# EAGLE board CAN_board (EAGLE 7.1.0)
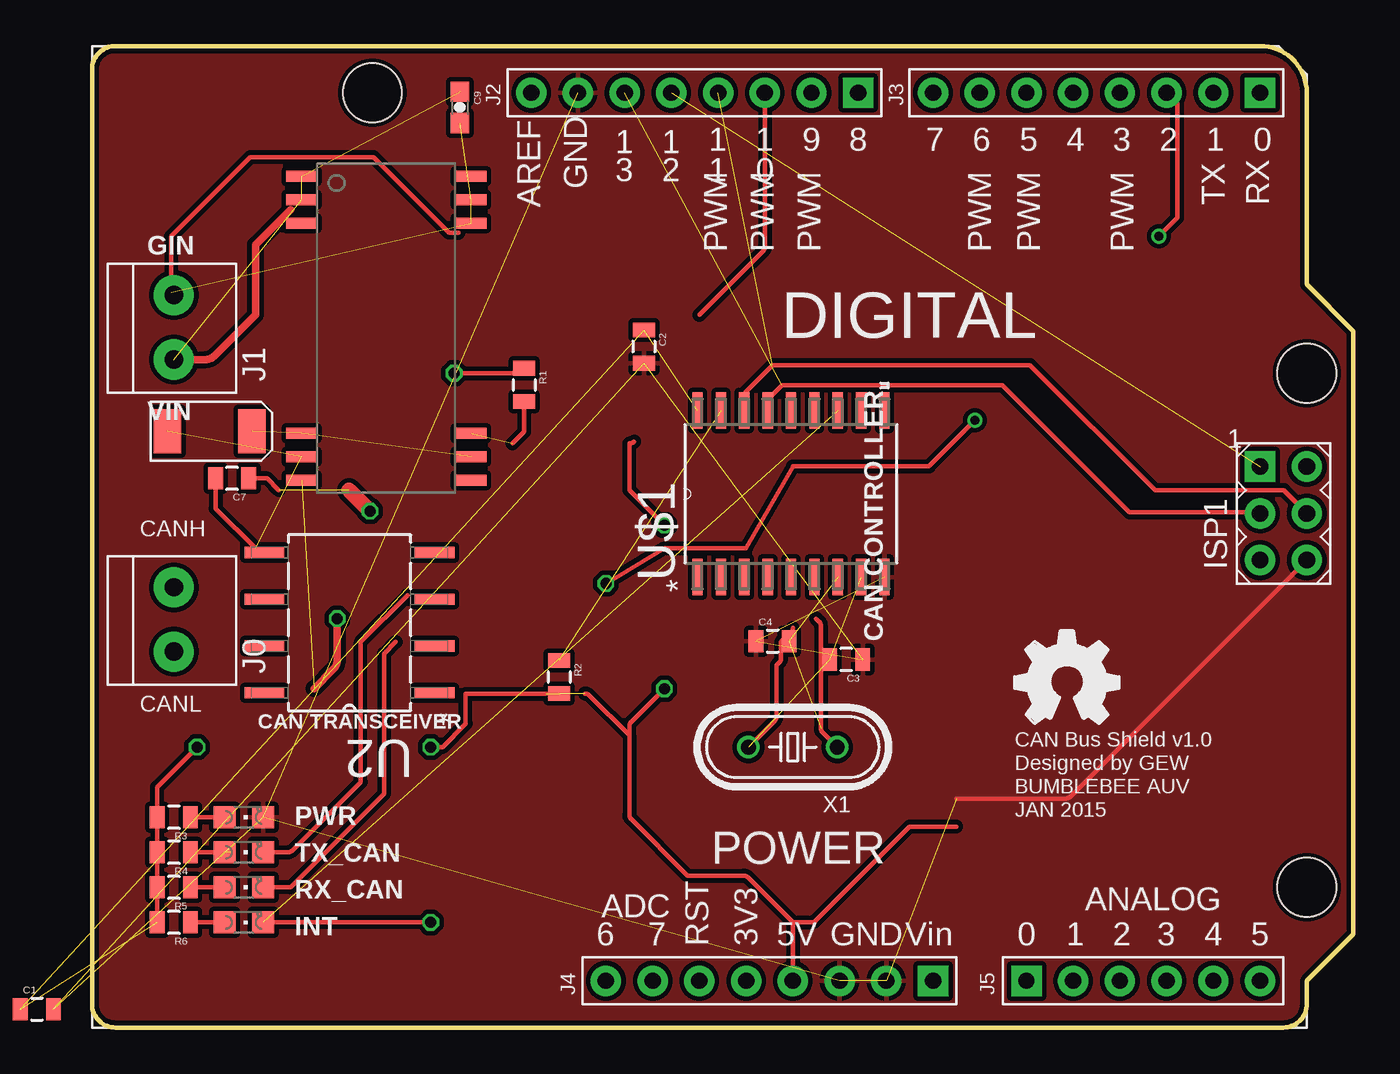
[diagram p0: board, top side]
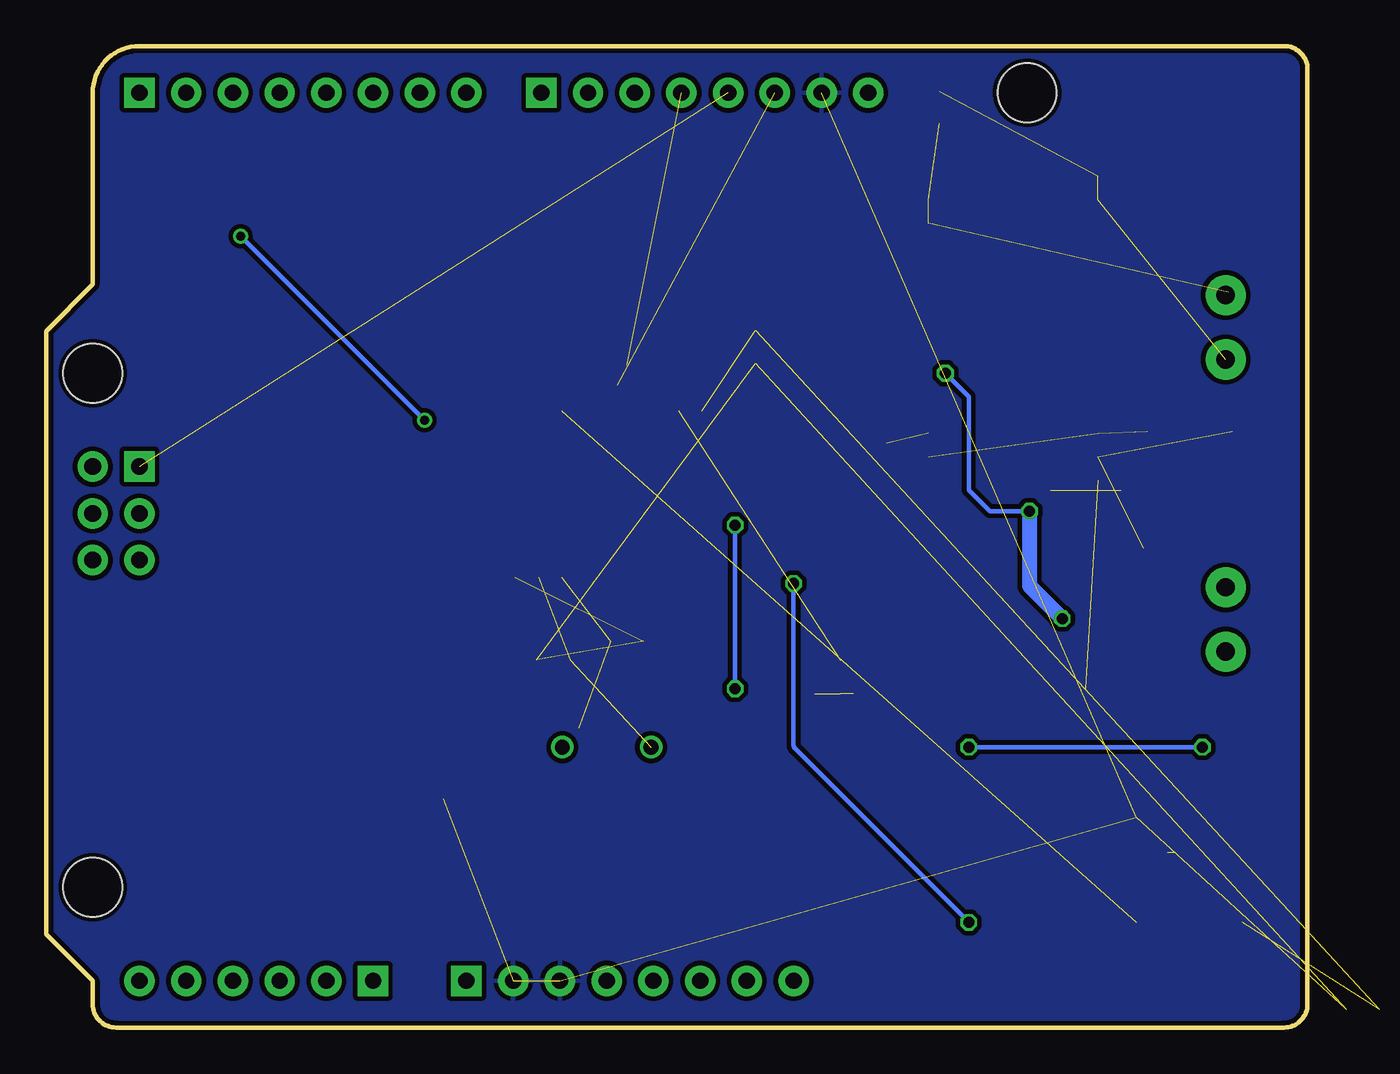
[diagram p1: board, bottom side, seen from below]

Size 68.58 x 53.34 mm. Coordinates in mm from the lower left corner, seen from the top.
Outline: 66.04,2.54 66.04,1.27 arc-90 64.77,0 1.27,0 arc-90 0,1.27 0,52.07 arc-90 1.27,53.34 63.5,53.34 arc-90 66.04,50.8 66.04,40.39 68.58,37.85 68.58,5.08 66.04,2.54
Copper layers (1*2*15*16): Top 0.035mm / dielectric 0.2mm / Route2 0.0175mm / dielectric 1.1mm / Route15 0.0175mm / dielectric 0.2mm / Bottom 0.035mm
Design rules "SeeedStudio_DRU_no_angle_20130527": minimum track width 6mil, minimum drill 12mil, track to track 6mil, track to pad 6mil, pad to pad 6mil, via to via 6mil, smd to smd 0mil, copper to edge 10mil, drill to drill 10mil, minimum pad ring 6mil, minimum via ring 6mil, stop-mask expansion 2mil, vias tented up to drill 25mil, thermal gap 10mil
Net classes: 0 default: width 0.203 mm, drill 0.305 mm, clearance 0.203 mm

## Footprints (pad centres in the part's own frame; a part is rotated, then mirrored left to right if it is on the bottom)
0805 = smd 0.8 x 1.2: 1 -0.9,0; 2 0.9,0
EIA6032 = smd 1.5 x 2.4: P$1 -2.3,0; P$2 2.3,0
0603-CAP = smd 1.1 x 1: 1 -0.85,0; 2 0.85,0
AVRISP = drill 0.9 pad 1.626: 1 -1.27,2.54; 2 1.27,2.54; 3 -1.27,0; 4 1.27,0; 5 -1.27,-2.54; 6 1.27,-2.54
1X2-3.5MM = drill 1 pad 2.184: 1 1.8,0; 2 -1.7,0
CHIPLED_0805 = smd 1.2 x 1.2: A 0,-1.05; C 0,1.05
SOIC254P1040X485-8N = smd 2.159 x 0.61: 1 -4.623,3.81; 2 -4.623,1.27; 3 -4.623,-1.27; 4 -4.623,-3.81; 5 4.623,-3.81; 6 4.623,-1.27; 7 4.623,1.27; 8 4.623,3.81
ARDUINO = drill 0.889 pad 1.651 square: 1 63.5,50.8; 9 41.656,50.8; 17 50.8,2.54; 23 45.72,2.54; 36 63.5,30.48 | drill 0.889 pad 1.651: 2 60.96,50.8; 3 58.42,50.8; 4 55.88,50.8; 5 53.34,50.8; 6 50.8,50.8; 7 48.26,50.8; 8 45.72,50.8; 10 39.116,50.8; 11 36.576,50.8; 12 34.036,50.8; 13 31.496,50.8; 14 28.956,50.8; 15 26.416,50.8; 16 23.876,50.8; 18 53.34,2.54; 19 55.88,2.54; 20 58.42,2.54; 21 60.96,2.54; 22 63.5,2.54; 24 43.18,2.54; 25 40.64,2.54; 26 38.1,2.54; 27 35.56,2.54; 28 33.02,2.54; 29 30.48,2.54; 30 27.94,2.54; 31 66.04,30.48; 32 66.04,27.94; 33 66.04,25.4; 34 63.5,25.4; 35 63.5,27.94 | hole 3.2: 15.24,50.8; 66.04,35.56; 66.04,7.62
SOIC127P1030X265-18N = smd 1.981 x 0.559: 1 -4.521,5.08; 2 -4.521,3.81; 3 -4.521,2.54; 4 -4.521,1.27; 5 -4.521,0; 6 -4.521,-1.27; 7 -4.521,-2.54; 8 -4.521,-3.81; 9 -4.521,-5.08; 10 4.521,-5.08; 11 4.521,-3.81; 12 4.521,-2.54; 13 4.521,-1.27; 14 4.521,0; 15 4.521,1.27; 16 4.521,2.54; 17 4.521,3.81; 18 4.521,5.08
DCR01-SOIC28 = smd 0.6 x 1.7: 1 -8.255,-4.6; 2 -6.985,-4.6; 3 -5.715,-4.6; 12 5.715,-4.6; 13 6.985,-4.6; 14 8.255,-4.6; 15 8.255,4.6; 16 6.985,4.6; 17 5.715,4.6; 26 -5.715,4.6; 27 -6.985,4.6; 28 -8.255,4.6; P$2 -6.985,4.6
HC49US = drill 0.813: 1 -2.413,0; 2 2.413,0

## Placement (x,y rotation side)
C1  100nF  [0805]  -3,1 0 top
C2  100nF  [0805]  30,37 270 top
C3  22pF  [0805]  41,20 180 top
C4  22pF  [0805]  37,21 0 top
C5  [EIA6032]  6.4,32.4 180 top
C7  100nF  [0805]  7.62,29.84 180 top
C9  2.2uF  [0603-CAP]  20,50 270 top
ISP1  AVRISP-6  [AVRISP]  64.77,27.94 0 top
J0  1X2-3.5MM  [1X2-3.5MM]  4.45,22.23 270 top
J1  1X2-3.5MM  [1X2-3.5MM]  4.45,38.1 270 top
LED1  YELLOW  [CHIPLED_0805]  8.26,11.43 270 top
LED2  BLUE  [CHIPLED_0805]  8.26,9.53 270 top
LED3  BLUE  [CHIPLED_0805]  8.26,7.62 270 top
LED4  RED  [CHIPLED_0805]  8.26,5.71 270 top
R1  10K  [0805]  23.5,34.92 270 top
R2  10K  [0805]  25.4,19.05 270 top
R3  330  [0805]  4.45,11.43 180 top
R4  330  [0805]  4.45,9.53 180 top
R5  330  [0805]  4.45,7.62 180 top
R6  330  [0805]  4.45,5.71 180 top
U2  ISO1050DUBR  [SOIC254P1040X485-8N]  14,22 180 top
U3  [ARDUINO]  0,0 0 top
U$1  MCP2515-E/SO  [SOIC127P1030X265-18N]  38,29 90 top
U$2  [OSHW_FILLX200_NOTEXT]  50.16,16.51 0 top
U$5  DCR01SO  [DCR01-SOIC28]  16,38 270 top
X1  16MHZ  [HC49US]  38.1,15.24 180 top

## Library data of the parts
C1 C2 C7 = SparkFun-Capacitors; OC_NEWARK: unknown; PROD_ID: CAP-08064
C3 C4 = SparkFun-Capacitors; MPN: MC0603N220K500CT; OC_NEWARK: 06R5152; PROD_ID: CAP-08064
C5 = SparkFun-Capacitors
C9 = SparkFun-Passives
ISP1 J0 J1 LED1-LED4 = adafruit; OC_NEWARK: unknown
R1 R2 = SparkFun-Passives; OC_NEWARK: unknown
R3-R6 = SparkFun-Resistors; OC_NEWARK: unknown
U2 = CAN-Controller-Library; MPN: ISO1050DUBR; OC_FARNELL: 2118645; OC_NEWARK: 14R9899; PACKAGE: DIP-8; SUPPLIER: TEXAS INSTRUMENTS
U3 = Module; OC_NEWARK: unknown
U$1 = CAN-Controller-Library; DESCRIPTION: IC CAN CONTROLLER; MPN: MCP2515-E/SO; OC_FARNELL: 1605565; OC_NEWARK: 29H7134; PACKAGE: SOIC-18; SUPPLIER: Microchip
U$2 = Logo
U$5 = bbauv
X1 = Discrete; MF: CITIZEN AMERICA, CORPORATION; MPN: HC49US16.000MABJ-UB; OC_NEWARK: 59K8183

## Nets
3V3: U3.27
5V: C1.1 C2.1 R2.2 R3.2 R4.2 R5.2 R6.2 U3.26 U$1.18
ADC0: U3.17
ADC1: U3.18
ADC2: U3.19
ADC3: U3.20
ADC4: U3.21
ADC5: U3.22
ADC6: U3.30
ADC7: U3.29
CANH: J0.1
CANL: J0.2
CS: U3.11
ERROR: R1.2 U$5.17
GIN: C9.2 J1.2 U$5.26 U$5.27
GND: C1.2 C2.2 C3.1 C4.1 ISP1.6 LED1.C U3.15 U3.24 U3.25 U$1.9
GNDBUS: C5.P$2 C7.2 U$5.13
INT: LED4.C U3.3 U$1.12
IO0: U3.1
IO1: U3.2
IO3: U3.4
IO4: U3.5
IO5: U3.6
IO6: U3.7
IO7: U3.8
IO8: U3.9
IO9: U3.10
MISO: ISP1.1 U3.13
MOSI: ISP1.4 U3.12
N$1: LED1.A R3.1
N$2: LED2.A R4.1
N$3: R2.1 U$1.17
N$15: LED3.A R5.1
N$19: LED4.A R6.1
OSC1: C3.2 U$1.8 X1.2
OSC2: C4.2 U$1.7 X1.1
REF: U3.16
RST: U3.28
RX_CAN: LED3.C
SCK: ISP1.3 U3.14
TX_CAN: LED2.C
VBUS: C7.1 R1.1 U$5.14
VCC: ISP1.2
VCC1: U2.1
VCC2: U2.8
VIN: U3.23
VIN2: C9.1 J1.1 U$5.1 U$5.2
VREC: C5.P$1 U$5.12 U$5.16

## Tracks (layer width: path | path; a pad name or v marks a point on that pad's centre or on a via)
5V  (via drill 0.6)  (5 unrouted)
  Top 0.254: R6.2 R5.2 R4.2 R3.2 3.54,13.07 v5.71,15.24 | v18.41,15.24 19.05,15.24 20.32,16.51 20.32,18.14 24.68,18.14 | 27.03,18.06 arc45 26.8,18.15 arc-45 27.03,18.06 | 29.21,15.88 29.21,11.56 arc45 29.3,11.34 32.38,8.26 35.43,8.26 arc-45 35.65,8.16 38.1,5.71 | 38.1,5.71 U3.26 | 38.1,5.71 39.11,5.71 arc45 39.34,5.81 44.45,10.92 46.99,10.92 | 27.03,18.06 29.21,15.88 | 29.21,15.88 29.21,16.38 arc-45 29.3,16.6 v31.11,18.41 | v31.11,27.3 29.21,29.21 29.21,31.75 29.24,31.75 arc45 29.47,31.84
  Bottom 0.254: v5.71,15.24 v18.41,15.24 | v31.11,18.41 v31.11,27.3
CANH
  Top 0.254: 4.97,20.95 J0.1
CANL
  Top 0.254: 4.88,23.5 J0.2
CS
  Top 0.254: U3.11 36.58,42.42 arc-45 36.48,42.2 33.02,38.73
ERROR  (1 unrouted)
  Top 0.254: R1.2 23.5,32.38 22.86,31.75
GIN  (3 unrouted)
  Top 0.254: 19.92,43.18 19.9,43.2 19.4,43.2 15.3,47.3 8.6,47.3 4.3,43 4.3,39.95 J1.2
GND  (9 unrouted)
  Top 0.254: 46.99,12.45 52.95,12.45 arc45 53.18,12.54 ISP1.6
  pour Top (isolate 0.254): 0,53.34 68.58,53.34 68.58,0 0,0
  pour Bottom (isolate 0.254): 0,53.34 68.58,53.34 68.58,0 0,0
GNDBUS  (2 unrouted)
  Top 0.254: C7.2 6.72,28.2 8.89,26.04
INT  (via drill 0.51, 0.6)  (1 unrouted)
  Top 0.254: v27.94,24.13 31.11,26.04 35.56,26.04 38.1,30.48 38.1,30.5 45.5,30.5 v48,33 | v18.41,5.71 LED4.C | v58,43 59,44 59,50.22 U3.3
  Bottom 0.254: v27.94,24.13 27.94,15.37 arc-45 27.85,15.15 v18.41,5.71 | v48,33 v58,43
MISO  (1 unrouted)
MOSI  (1 unrouted)
  Top 0.254: ISP1.4 66.04,27.96 64.8,29.2 57.8,29.2 51,36 37,36 35.5,34.5 35.5,32.91
N$1
  Top 0.254: R3.1 LED1.A
N$2  (1 unrouted)
  Top 0.254: R4.1 7.62,9.53
N$3  (1 unrouted)
N$15
  Top 0.254: LED3.A R5.1
N$19
  Top 0.254: LED4.A R6.1
OSC1  (2 unrouted)
  Top 0.254: 38.1,21.72 arc-45 38.01,21.5 37.47,20.95 37.47,20.07 arc-45 37.37,19.85 37.21,19.68 37.21,16.9 arc-45 37.12,16.67 X1.2
OSC2  (2 unrouted)
  Top 0.254: X1.1 39.72,16.04 arc-45 39.62,16.26 39.62,21.84 arc45 39.53,22.06 39.37,22.23
RX_CAN
  Top 0.254: 16.51,20.95 15.88,20.32 15.88,12.7 10.79,7.62 LED3.C
SCK  (1 unrouted)
  Top 0.254: 36.83,34.23 37.5,34.9 49.5,34.9 56.4,28 63.44,28 ISP1.3
TX_CAN
  Top 0.254: LED2.C 10.66,9.53 arc45 10.89,9.62 14.61,13.34 14.61,20.95 17.14,23.5
VBUS  (via drill 0.6)  (2 unrouted)
  Top 0.254: 10.16,29.21 9.53,29.84 C7.1 | v19.68,35.56 23.23,35.56 R1.1
  Top 0.406: v13.34,22.23 13.34,19.95 arc-45 13.15,19.5 12.06,18.41
  Top 0.813: 13.97,29.21 v15.11,28.07
  Bottom 0.254: v15.11,28.07 17.27,28.07 18.41,29.21 18.41,34.29 v19.68,35.56
  Bottom 0.813: v15.11,28.07 15.11,24 v13.34,22.23
VIN2  (3 unrouted)
  Top 0.406: J1.1 6.19,36.3 arc45 6.64,36.49 8.89,38.73 8.89,42.55 10.79,44.45
VREC  (2 unrouted)

## Text on the board
tPlace: J2 | J3 | GIN | VIN | CANH | CAN CONTROLLER | CANL | CAN TRANSCEIVER | CAN Bus Shield v1.0 | Designed by GEW | BUMBLEBEE AUV | PWR | JAN 2015 | TX_CAN | RX_CAN | INT | J4 | J5